# Altium PCB Main.PcbDoc
Units mm, origin at the board's own origin, x right, y up, seen from the top; angles counter-clockwise.
Board outline 95 x 57 mm, 2 copper layers (Top Layer, Bottom Layer), stack 1.671 mm thick; 91 components, 89 nets, 355 pads, 0 vias.
Unrouted connection lines stored in the file: 230.
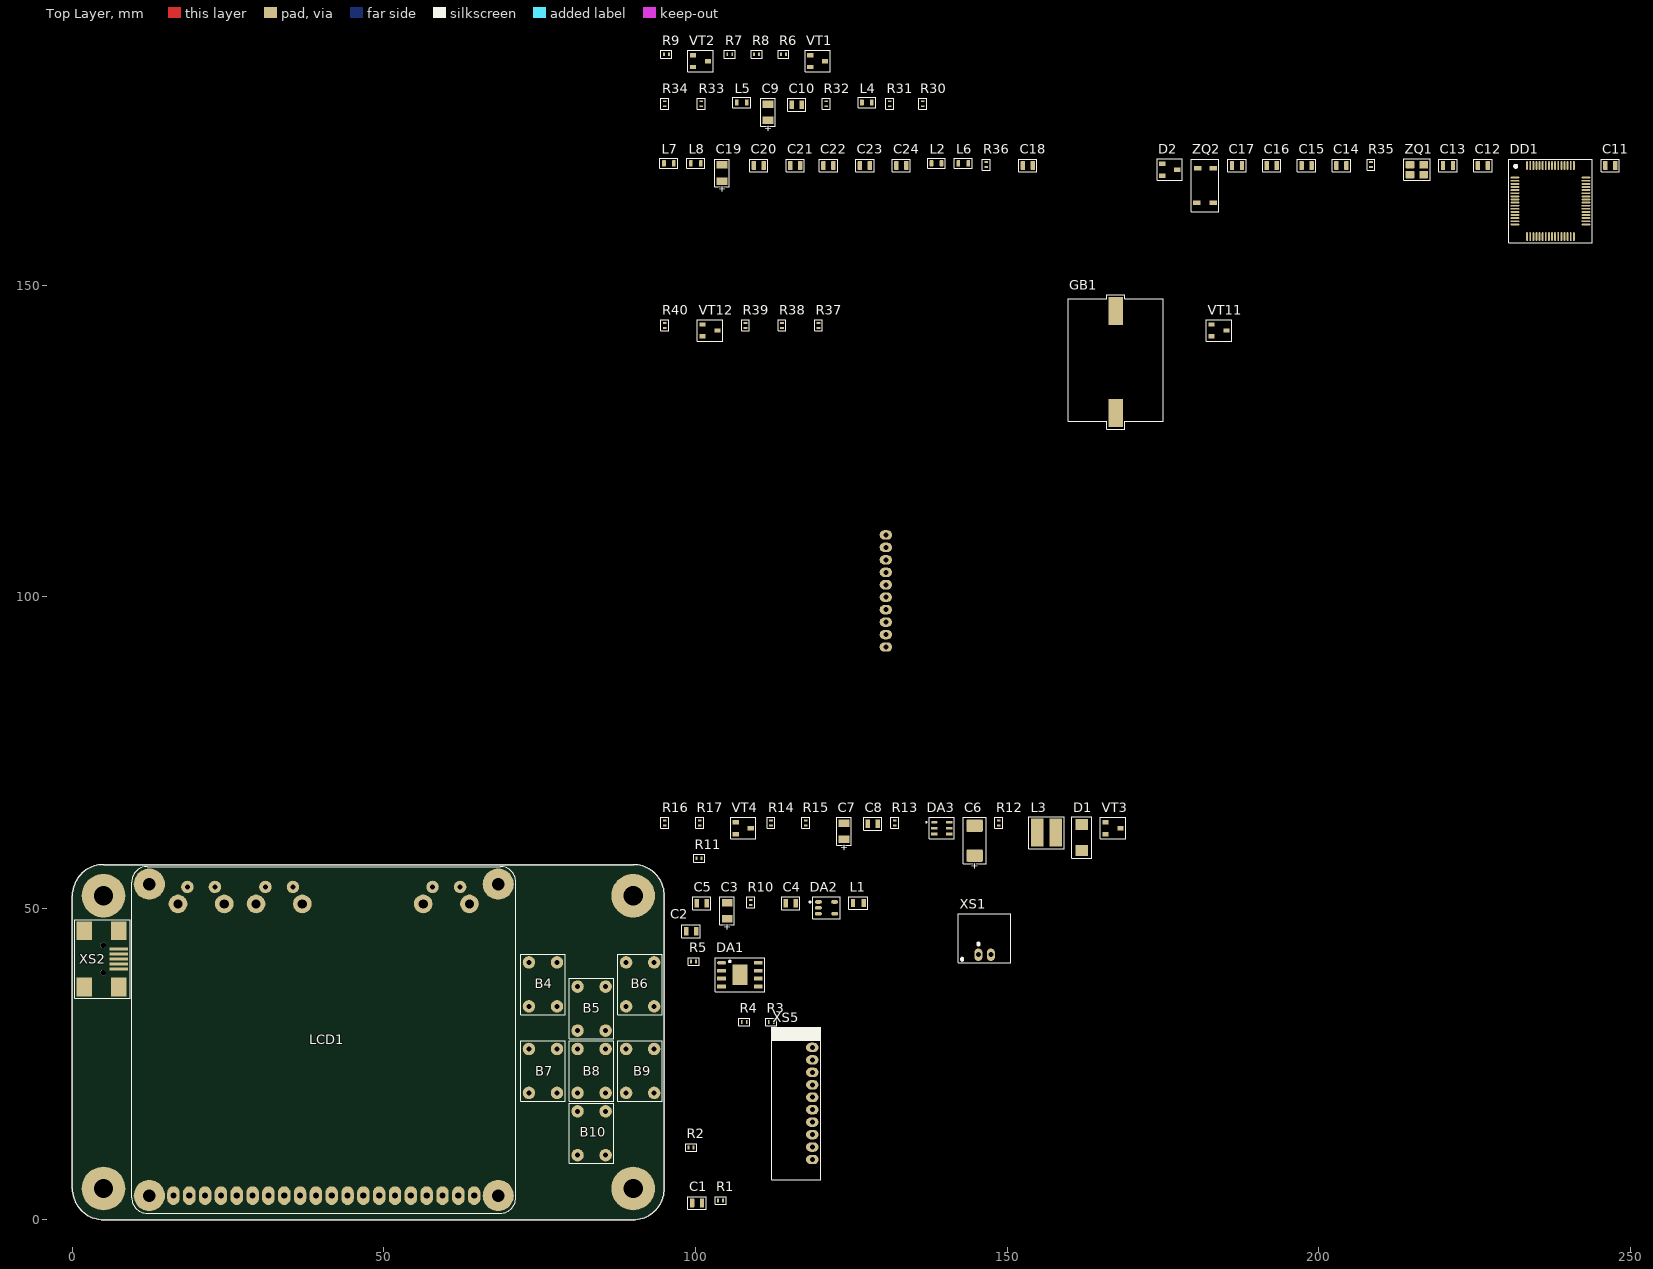
[diagram p0: Top Layer view]
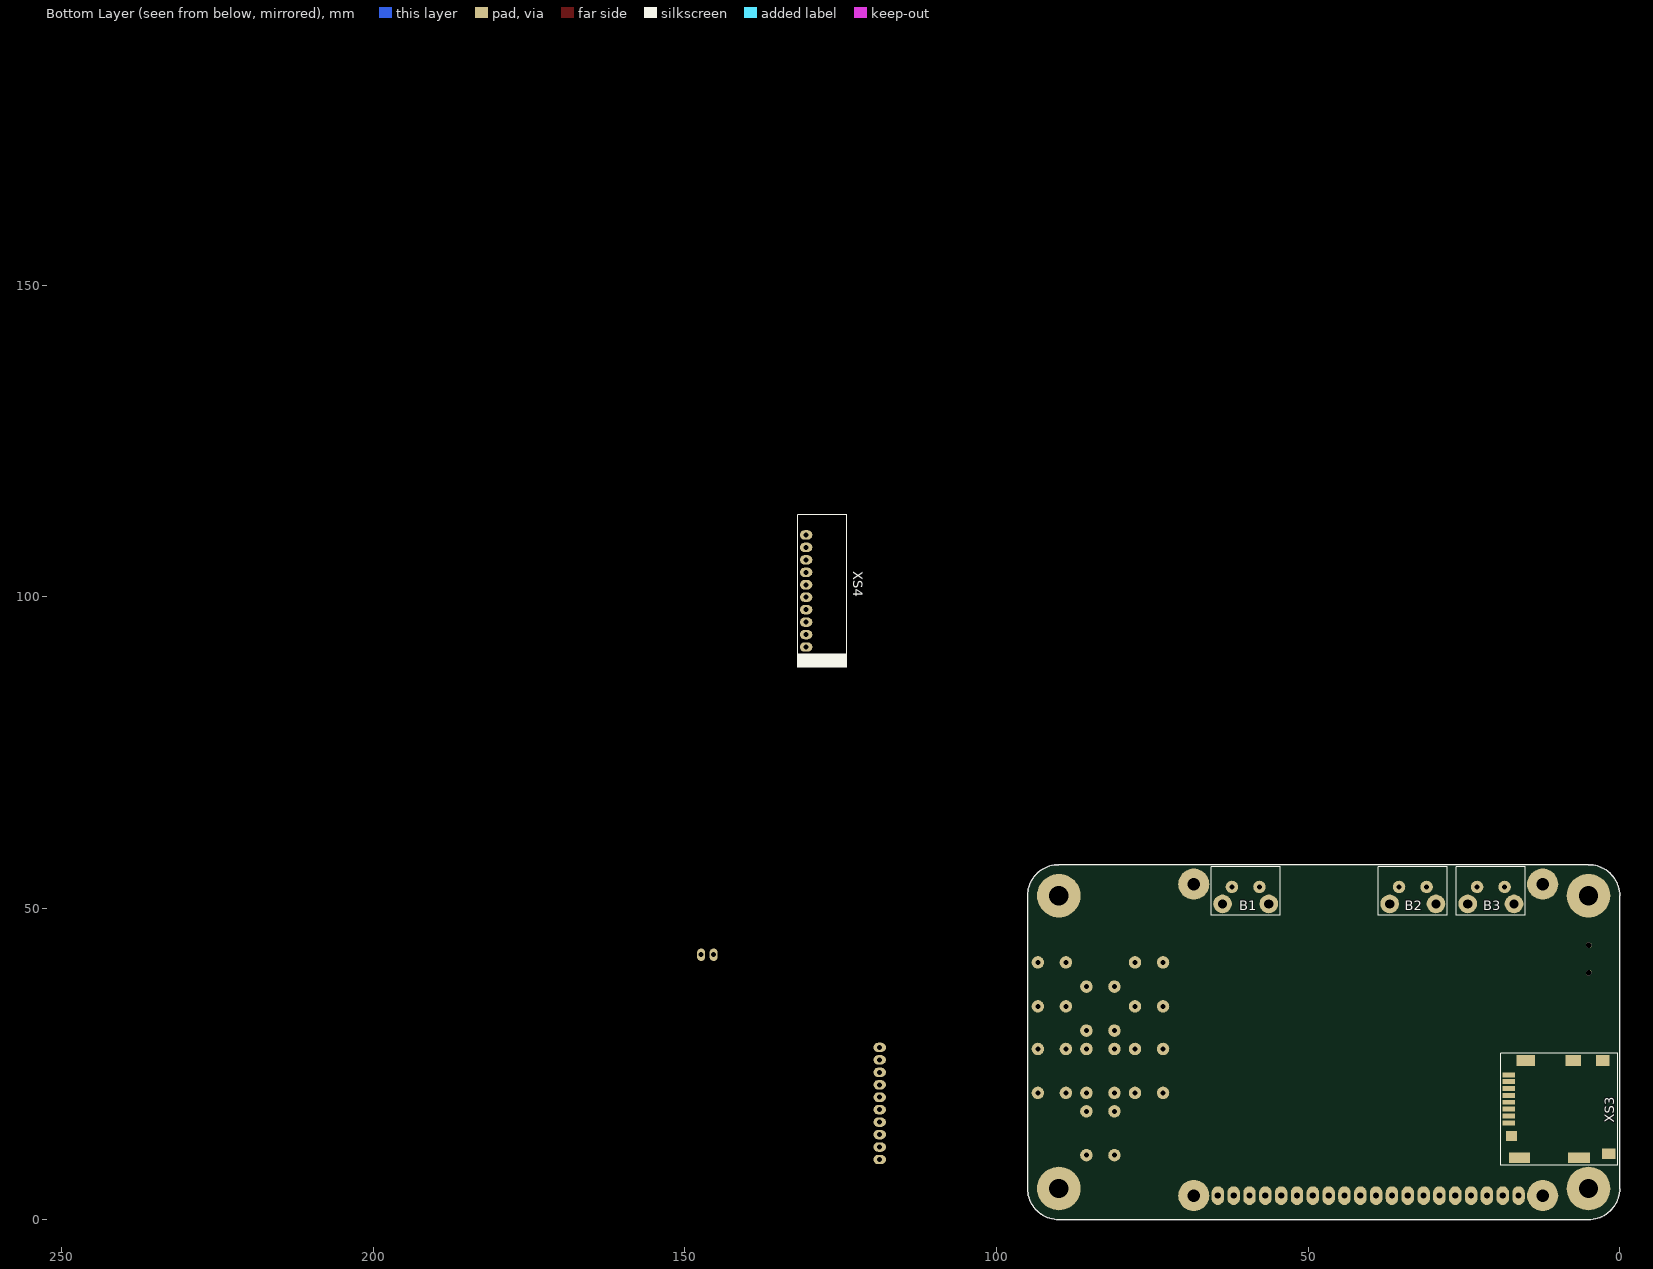
[diagram p1: Bottom Layer view, seen from below]

## Layer stack, top to bottom
Top Solder: solder mask 0.0102, Solder Resist, Dk 3.5
Top Layer: signal copper 0.0356
Dielectric 1: dielectric 1.6, FR-4, Dk 4.8
Bottom Layer: signal copper 0.0356
Bottom Solder: solder mask 0.0102, Solder Resist, Dk 3.5

## Board outline
0,5 0,52 cw(c5,52) 5,57 90,57 cw(c90,52) 95,52 95,5 cw(c90,5) 90,0 5,0 cw(c5,5)

## Design rules (kind name [scope] priority, off if disabled: settings)
Clearance [All] p1: gap=0.15 ignorepadtopadclearanceinfootprint=FALSE
ComponentClearance [All] p1: gap=0.1 collisioncheckmode=3 verticalgap=1 showdistances=TRUE
DiffPairsRouting [All] p1: maxlimit=0.3 minlimit=0.15 mostfreqgap=0.3 toplayer_minwidth=0.15 toplayer_maxwidth=0.3 toplayer_prefwidth=0.3 bottomlayer_minwidth=0.15 bottomlayer_maxwidth=0.3 bottomlayer_prefwidth=0.3 maxuncoupledlength=12.7
HoleSize [All] p1: absolutevalues=TRUE maxlimit=3.1 minlimit=0.3 maxpercent=80.000 minpercent=20.000
HoleToHoleClearance [All] p1: gap=0.3 allowstackedmicrovias=TRUE
MatchedLengths SDIO [InNetClass('SDIO')] p1: tolerance=1 checknetsindiffpair=FALSE checkdiffpairvsdiffpair=TRUE checkxsignals=TRUE checkothers=TRUE
MatchedLengths Usb [InNetClass('Usb')] p2: tolerance=1 checknetsindiffpair=TRUE checkdiffpairvsdiffpair=FALSE checkxsignals=FALSE checkothers=FALSE
MinimumSolderMaskSliver [All] p1: minsoldermaskwidth=0.05
PlaneClearance [All] p1: clearance=0.08
PlaneConnect [All] p1: planeconnectstyle=Relief reliefexpansion=0.15 reliefentries=4 reliefconductorwidth=0.15 reliefairgap=0.15
PolygonConnect SdGND [InNet('SD_GND')] p1: thpad.connectstyle=Relief thpad.reliefconductorwidth=0.15 thpad.reliefentries=4 thpad.polygonreliefangle="90 Angle" thpad.airgapwidth=0.15 smdpad.connectstyle=Relief smdpad.reliefconductorwidth=0.15 smdpad.reliefentries=4 smdpad.polygonreliefangle="90 Angle" smdpad.airgapwidth=0.15 via.connectstyle=Direct via.reliefconductorwidth=0.254 via.reliefentries=4 via.polygonreliefangle="90 Angle" via.airgapwidth=0.254
PolygonConnect McGND [InNet('MC_GND') vs InNet('MC_GND')] p2: thpad.connectstyle=Relief thpad.reliefconductorwidth=0.15 thpad.reliefentries=4 thpad.polygonreliefangle="90 Angle" thpad.airgapwidth=0.15 smdpad.connectstyle=Relief smdpad.reliefconductorwidth=0.15 smdpad.reliefentries=4 smdpad.polygonreliefangle="90 Angle" smdpad.airgapwidth=0.15 via.connectstyle=Direct via.reliefconductorwidth=0.254 via.reliefentries=4 via.polygonreliefangle="90 Angle" via.airgapwidth=0.254
PolygonConnect BatGND [InNet('BAT_GND') vs InNet('BAT_GND')] p3: thpad.connectstyle=Relief thpad.reliefconductorwidth=0.15 thpad.reliefentries=4 thpad.polygonreliefangle="90 Angle" thpad.airgapwidth=0.15 smdpad.connectstyle=Relief smdpad.reliefconductorwidth=0.15 smdpad.reliefentries=4 smdpad.polygonreliefangle="90 Angle" smdpad.airgapwidth=0.15 via.connectstyle=Direct via.reliefconductorwidth=0.254 via.reliefentries=4 via.polygonreliefangle="90 Angle" via.airgapwidth=0.254
PolygonConnect [All] p4: connectstyle=Relief reliefconductorwidth=0.15 reliefentries=4 polygonreliefangle="90 Angle" airgapwidth=0.15
RoutingVias [All] p1: holewidth=0.3 width=0.7 viastyle="Through Hole" minholewidth=0.3 minwidth=0.7 maxholewidth=0.3 maxwidth=0.7
SilkToSilkClearance [All] p1: silktosilkclearance=0.15
SilkToSolderMaskClearance [IsPad] p1: minsilkscreentomaskgap=0.15 clearancetoexposedcopper=TRUE
SolderMaskExpansion [All] p1: expansion=0.05
Width [All] p1: maxlimit=1 minlimit=0.15 preferedwidth=0.3
21 further rules are at their usual default settings.

## Classes and differential pairs
component class Microcontroller: C11 C12 C13 C14 C15 C16 C17 C18 C19 C20 C21 C22 C23 C24 D2 DD1 GB1 L2 L6 L7 L8 R35 R36 ZQ1 ZQ2
component class DcDc5V: C6 C7 C8 D1 DA3 L3 R12 R13 R14 R15 R16 R17 VT3 VT4
component class DcDc3V3: C3 C4 C5 DA2 L1 R10 R11
component class BatteryCheck: C1 R1 R2
component class Connectors: B1 B2 B3 R3 R4 XS1 XS2 XS3 XS4 XS5
component class ControlledCharger: C2 DA1 R5
component class PowerManagement: R6 R7 R8 R9 VT1 VT2
component class MicroSdCard: C9 C10 L4 L5 R30 R31 R32 R33 R34
component class KeyBoard: B4 B5 B6 B7 B8 B9 B10
component class Lcd: LCD1 R37 R38 R39 R40 VT11 VT12

## Components (designator, comment, footprint, x,y, rotation, side; value= is the part's Value field where it differs from the comment)
B1 "PWR_ON" "TACT SKHH Horizontal Switch" 63.725,50.675 r180 bottom locked
B2 "VALUE_UP" "TACT SKHH Horizontal Switch" 36.9,50.675 r180 bottom locked
B3 "VALUE_DOWN" "TACT SKHH Horizontal Switch" 24.375,50.675 r180 bottom locked
B4 "MENY" BUTTON_DIP 73.375,41.175 r0 top
B5 "UP" BUTTON_DIP 81.175,37.275 r0 top
B6 "RETURN" BUTTON_DIP 88.975,41.175 r0 top
B7 "LEFT" BUTTON_DIP 73.375,27.275 r0 top
B8 "ENTER" BUTTON_DIP 81.175,27.275 r0 top
B9 "RIGHT" BUTTON_DIP 88.975,27.275 r0 top
B10 "DOWN" BUTTON_DIP 81.175,17.275 r0 top
C1 "0.1 мкФ" "C 0805" 99.331,3.303 r0 top
C2 "0.1 мкФ" "C 0805" 98.375,46.9 r0 top
C3 "10 мкФ" "C TAN_A" 104.282,47.981 r90 top
C4 "18 пФ" "C 0805" 114.357,51.406 r0 top
C5 "4.7 мкФ" "C 0805" 100.081,51.406 r0 top
C6 "100 мкФ" "C TAN_C" 144.809,60.831 r90 top
C7 "10 мкФ" "C TAN_A" 123.032,60.731 r90 top
C8 "0.1 мкФ" "C 0805" 127.533,64.156 r0 top
C9 "10 мкФ" "C TAN_A" 110.832,176.137 r90 top
C10 "0.1 мкФ" "C 0805" 115.332,179.562 r0 top
C11 "22 пФ" "C 0805" 245.888,169.811 r0 top
C12 "4.7 мкФ" "C 0805" 225.437,169.811 r0 top
C13 "22 пФ" "C 0805" 219.837,169.811 r0 top
C14 "4.7 мкФ" "C 0805" 202.736,169.811 r0 top
C15 "0.1 мкФ" "C 0805" 197.161,169.811 r0 top
C16 "22 пФ" "C 0805" 191.561,169.811 r0 top
C17 "22 пФ" "C 0805" 185.986,169.811 r0 top
C18 "0.1 мкФ" "C 0805" 152.409,169.811 r0 top
C19 "10 мкФ" "C TAN_A" 103.457,166.386 r90 top
C20 "0.1 мкФ" "C 0805" 109.232,169.811 r0 top
C21 "0.1 мкФ" "C 0805" 115.082,169.811 r0 top
C22 "0.1 мкФ" "C 0805" 120.407,169.811 r0 top
C23 "0.1 мкФ" "C 0805" 126.258,169.811 r0 top
C24 "0.1 мкФ" "C 0805" 132.108,169.811 r0 top
D1 "SS14 (1n5819)" SMA/DO-214AC 161.984,61.331 r90 top
D2 "BAT54C" SOT-23 176.11,168.511 r0 top
DA1 "TP4056" HSOP-8 107.132,39.33 r0 top
DA2 "NCP1529ASNT1G" TSOP-5 121.032,50.056 r0 top
DA3 "PT1301" SOT-23-6 139.533,62.831 r0 top
DD1 "STM32F415RxTx" LQFP64 237.213,163.486 r0 top
GB1 "S8411-45R" S8411-45R 167.45,137.65 r0 top
L1 "LQM21NN2R2K" LQM21N 125.283,50.831 r0 top
L2 "BLM18AG102SN1" "FB 0603" 138.683,169.536 r0 top
L3 "4.7 мкГн" CD43 156.334,62.131 r0 top
L4 "BLM18AG102SN1" "FB 0603" 127.508,179.287 r0 top
L5 "BLM18AG102SN1" "FB 0603" 107.432,179.287 r0 top
L6 "BLM18AG102SN1" "FB 0603" 142.983,169.536 r0 top
L7 "BLM18AG102SN1" "FB 0603" 95.731,169.536 r0 top
L8 "BLM18AG102SN1" "FB 0603" 100.056,169.536 r0 top
LCD1 "20PIN COG 12864 LCD Screen Module ST7565R" "COG 12864 LCD Screen Module ST7565R" 9.52,1.032 r0 top locked
R1 "10 кОм" "RES 0402" 104.032,3.078 r0 top
R2 "10 кОм" "RES 0402" 99.3,11.6 r0 top
R3 "11 кОм" "RES 0402" 112.157,31.73 r0 top
R4 "1.5 кОм" "RES 0402" 107.832,31.73 r0 top
R5 "10 кОм" "RES 0402" 99.706,41.43 r0 top
R6 "4.7 кОм" "RES 0402" 114.132,187.037 r0 top
R7 "1 кОм" "RES 0402" 105.507,187.037 r0 top
R8 "27 Ом" "RES 0402" 109.807,187.037 r0 top
R9 "10 кОм" "RES 0402" 95.331,187.037 r0 top
R10 "910 кОм" "RES 0402" 108.857,50.931 r90 top
R11 "200 кОм" "RES 0402" 100.575,58.025 r0 top
R12 "4.7 кОм" "RES 0402" 148.684,63.681 r90 top
R13 "27 Ом" "RES 0402" 131.983,63.681 r90 top
R14 "1 кОм" "RES 0402" 112.107,63.681 r90 top
R15 "3 мОм" "RES 0402" 117.682,63.681 r90 top
R16 "10 кОм" "RES 0402" 95.081,63.681 r90 top
R17 "1 мОм" "RES 0402" 100.681,63.681 r90 top
R30 "47 кОм" "RES 0402" 136.483,179.087 r90 top
R31 "47 кОм" "RES 0402" 131.158,179.087 r90 top
R32 "47 кОм" "RES 0402" 121.007,179.087 r90 top
R33 "47 кОм" "RES 0402" 100.931,179.087 r90 top
R34 "47 кОм" "RES 0402" 95.081,179.087 r90 top
R35 "11 кОм" "RES 0402" 208.412,169.336 r90 top
R36 "1.5 кОм" "RES 0402" 146.659,169.336 r90 top
R37 "4.7 кОм" "RES 0402" 119.732,143.535 r90 top
R38 "27 Ом" "RES 0402" 113.882,143.535 r90 top
R39 "1 кОм" "RES 0402" 108.032,143.535 r90 top
R40 "10 кОм" "RES 0402" 95.081,143.535 r90 top
VT1 "IRLML6402" SOT-23 119.607,185.937 r0 top
VT2 "BC817" SOT-23 100.806,185.937 r0 top
VT3 "IRLML6402" SOT-23 167.01,62.831 r0 top
VT4 "BC817" SOT-23 107.657,62.831 r0 top
VT11 "IRLML6402" SOT-23 184.035,142.71 r0 top
VT12 "BC817" SOT-23 102.331,142.71 r0 top
XS1 "Battery" "JST B2B-PH-SM4-TB" 145.4,42.525 r0 top
XS2 "USB-mini, type B" USB_mini_B -0.96,41.85 r90 top locked
XS3 "49225-0821" "MOLEX 49225-0821" 1.075,17.75 r270 bottom locked
XS4 "JST B10B-PH-SM4-TB" B10B-PH-SM4-TB 130.55,109.9 r270 bottom
XS5 "JST B10B-PH-SM4-TB" B10B-PH-SM4-TB 118.75,9.654 r90 top
ZQ1 "NX3225SA-16.000M-STD-CRS-2" NX3225SA 215.762,168.511 r0 top value="16 МГц"
ZQ2 "MC-306" MC-306 180.185,161.986 r90 top value=32.768kHz

## Footprints (in the part's own frame and the unit in brackets; to place one, negate y for a bottom-side part, rotate by r counter-clockwise, add the part's x,y. Pads: shape width x height; smd on the part's side, far side on the other; paste and mask are expansions set on the pad)
B10B-PH-SM4-TB [mm]
  oval 1.5x2 hole 0.8: 1(18,0) 2(16,0) 3(14,0) 4(12,0) 5(10,0) 6(8,0) 7(6,0) 8(4,0) 9(2,0) 10(0,0)
  silkscreen extent -3.22,-1.35 21.2,6.55, body extent -2.97,-0.3 20.98,6.3, height 5.02
BUTTON_DIP [mm]
  round 2 hole 0.8: 1(-0.1,-6.925) 1(-0.1,0.125) 2(4.4,-6.925) 2(4.4,0.125)
  silkscreen extent -1.43,-8.25 5.72,1.45, body extent -0.95,-7.35 5.25,0.55, height 7
"C 0805" [mm]
  rrect20% 0.7x1.4 smd: 1(0.125,-0.625) 2(1.725,-0.625)
  silkscreen extent -0.55,-1.65 2.4,0.4, body extent -0.1,-1.28 1.9,0.03, height 0.73
"C TAN_A" [mm]
  rect 1.2x1.7 smd: 1(0.3,-0.8) 2(2.9,-0.8)
  silkscreen extent -0.63,-1.97 3.83,0.38, body extent -0.1,-1.7 3.3,0.1, height 1.7
"C TAN_C" [mm]
  rrect20% 2x2.6 smd: 1(-2.4,0) 2(2.4,0)
  silkscreen extent -3.72,-1.83 3.72,1.83, body extent -3,-1.6 3,1.6, height 2.6
CD43 [mm] "Для катушки индуктивности."
  rect 2x4.5 smd: 1(-1.5,0) 2(1.5,0)
  silkscreen extent -2.83,-2.58 2.83,2.58, body extent -2.4,-2.15 2.4,2.15, height 3.5
"COG 12864 LCD Screen Module ST7565R" [mm]
  round 5 hole 2: 0(2.83,2.843) 0(2.83,52.817) 0(58.82,2.843) 0(58.82,52.817)
  oval 2x3 hole 1: 1(54.96,2.833) 2(52.42,2.833) 3(49.88,2.833) 4(47.34,2.833) 5(44.8,2.833) 6(42.26,2.833) 7(39.72,2.833) 8(37.18,2.833) 9(34.64,2.833) 10(32.1,2.833) 11(29.56,2.833) 12(27.02,2.833) 13(24.48,2.833) 14(21.94,2.833) 15(19.4,2.833) 16(16.86,2.833) 17(14.32,2.833) 18(11.78,2.833) 19(9.24,2.833) 20(6.7,2.833)
  silkscreen extent 0,0 61.65,55.65, body extent 0.51,0.77 61.13,54.88, height 9.4
"FB 0603" [mm]
  rrect35% 0.6x1 smd: 1(-0.8,0) 2(0.8,0)
  silkscreen extent -1.43,-0.82 1.43,0.82, body extent -0.8,-0.43 0.8,0.43, height 0.9
HSOP-8 [mm]
  oval 1.4x0.6 smd: 1(-2.95,1.905)
  rect 1.4x0.6 smd: 2(-2.95,0.635) 3(-2.95,-0.635) 4(-2.95,-1.905) 5(2.95,-1.905) 6(2.95,-0.635) 7(2.95,0.635) 8(2.95,1.905)
  rect 2.41x3.3 smd: EP(0,0)
  silkscreen extent -3.98,-2.73 3.98,2.73, body extent -3,-2.5 3,2.5, height 1.7
"JST B2B-PH-SM4-TB" [mm]
  oval 1.3x2 hole 0.8: 1(0,0) 2(2,0)
  silkscreen extent -3.2,-1.33 5.2,6.58, body extent -2.98,-0.25 4.97,6.35, height 5
LQFP64 [mm]
  oval 1.4x0.3 smd: 1(-5.7,3.75) 2(-5.7,3.25) 3(-5.7,2.75) 4(-5.7,2.25) 5(-5.7,1.75) 6(-5.7,1.25) 7(-5.7,0.75) 8(-5.7,0.25) 9(-5.7,-0.25) 10(-5.7,-0.75) 11(-5.7,-1.25) 12(-5.7,-1.75) 13(-5.7,-2.25) 14(-5.7,-2.75) 15(-5.7,-3.25) 16(-5.7,-3.75) 33(5.7,-3.75) 34(5.7,-3.25) 35(5.7,-2.75) 36(5.7,-2.25) 37(5.7,-1.75) 38(5.7,-1.25) 39(5.7,-0.75) 40(5.7,-0.25) 41(5.7,0.25) 42(5.7,0.75) 43(5.7,1.25) 44(5.7,1.75) 45(5.7,2.25) 46(5.7,2.75) 47(5.7,3.25) 48(5.7,3.75)
  oval 0.3x1.4 smd: 17(-3.75,-5.7) 18(-3.25,-5.7) 19(-2.75,-5.7) 20(-2.25,-5.7) 21(-1.75,-5.7) 22(-1.25,-5.7) 23(-0.75,-5.7) 24(-0.25,-5.7) 25(0.25,-5.7) 26(0.75,-5.7) 27(1.25,-5.7) 28(1.75,-5.7) 29(2.25,-5.7) 30(2.75,-5.7) 31(3.25,-5.7) 32(3.75,-5.7) 49(3.75,5.7) 50(3.25,5.7) 51(2.75,5.7) 52(2.25,5.7) 53(1.75,5.7) 54(1.25,5.7) 55(0.75,5.7) 56(0.25,5.7) 57(-0.25,5.7) 58(-0.75,5.7) 59(-1.25,5.7) 60(-1.75,5.7) 61(-2.25,5.7) 62(-2.75,5.7) 63(-3.25,5.7) 64(-3.75,5.7)
  silkscreen extent -6.73,-6.73 6.73,6.73, body extent -6,-6 6,6, height 1.6
LQM21N [mm] "(0805 Size)"
  rect 0.7x1.3 smd: 1(0,0) 2(1.7,0)
  silkscreen extent -0.67,-0.98 2.37,0.97, body extent -0.15,-0.63 1.85,0.62, height 0.6
MC-306 [mm]
  rect 0.7x1.2 smd: 1(1.25,-2.9) 2(6.75,-2.9) 3(6.75,-0.4) 4(1.25,-0.3)
  silkscreen extent -0.23,-3.83 8.23,0.63, body extent 0,-3.5 8,0.3, height 2.54
"MOLEX 49225-0821" [mm]
  rect 1.7x2.2 smd: 0(-7.8,-1.65) 0(7.15,-0.65)
  rect 1.7x3.4 smd: 0(7.8,-15)
  rect 1.7x3.6 smd: 0(7.8,-5.45)
  rect 0.8x2 smd: 1(2.2,-16.7) 2(1.1,-16.7) 3(0,-16.7) 4(-1.1,-16.7) 5(-2.2,-16.7) 6(-3.3,-16.7) 7(-4.4,-16.7) 8(-5.5,-16.7)
  rect 1.7x3 smd: 9(-7.8,-14)
  rect 1.7x2.5 smd: 10(-7.8,-6.4)
  rect 1.6x1.8 smd: 11(4.29,-16.3)
  silkscreen extent -8.98,-18.03 8.98,0.77, body extent -8.05,-17.05 8.05,0, height 1.98
NX3225SA [mm]
  rrect20% 1.4x1.2 smd: 1(-1.1,-0.8) 2(1.1,-0.8) 3(1.1,0.8) 4(-1.1,0.8)
  silkscreen extent -2.12,-1.73 2.12,1.73, body extent -1.6,-1.25 1.61,1.26, height 0.55
"RES 0402" [mm]
  rect 0.3x0.6 smd: 1(-0.4,0) 2(0.4,0)
  silkscreen extent -0.87,-0.63 0.87,0.63, body extent -0.5,-0.25 0.5,0.25, height 0.35
S8411-45R [mm]
  round 0 hole 1.26: 0(0,-3.95)
  round 0 hole 1.1: 0(0,3.5)
  rect 2.3x4.5 smd: 1(0,-8.2) 2(0,8.2)
  silkscreen extent -7.6,-10.78 7.6,10.78, body extent -7.37,-9.25 7.37,9.95, height 4.25
SMA/DO-214AC [mm]
  rect 1.8x2 smd: A(2.1,0) C(-2.1,0)
  silkscreen extent -3.35,-1.6 3.35,1.6, body extent -2.5,-1.35 2.5,1.35, height 2.2
SOT-23 [mm]
  rect 1x0.7 smd paste-0.05: 1(-1.2,0.95) 2(-1.2,-0.95) 3(1.2,0)
  silkscreen extent -2.02,-1.73 2.02,1.73, body extent -1.25,-1.5 1.25,1.5, height 1
SOT-23-6 [mm]
  oval 1x0.45 smd: 1(-1.2,0.95)
  rect 1x0.45 smd: 2(-1.2,0) 3(-1.2,-0.95) 4(1.2,-0.95) 5(1.2,0) 6(1.2,0.95)
  silkscreen extent -2.57,-1.73 2.02,1.73, body extent -1.33,-1.5 1.47,1.5, height 1.35
"TACT SKHH Horizontal Switch" [mm]
  round 3 hole 1.5: 0(0,0) 0(7.425,0)
  round 2 hole 0.8: 1(1.5,2.725) 2(5.925,2.725)
  silkscreen extent -1.83,-1.83 9.25,6, body extent -0.48,-1.38 7.88,11.09, height 7.37
TSOP-5 [mm]
  oval 1.1x0.6 smd: 1(-1.3,0.95) 2(-1.3,0) 3(-1.3,-0.95) 4(1.3,-0.95) 5(1.3,0.95)
  silkscreen extent -2.77,-1.75 2.17,1.75, body extent -1.53,-1.55 1.48,1.55, height 1.1
USB_mini_B [mm]
  rect 3x2.5 smd paste-2: 0(-4.5,-2.9) 0(-4.5,-8.4) 0(4.5,-2.9) 0(4.5,-8.4)
  rect 0.5x3 smd: 1(1.6,-8.4) 2(0.8,-8.4) 3(0,-8.4) 4(-0.8,-8.4) 5(-1.6,-8.4)
  round 0.9 hole 0.9 unplated mask+0: H(-2.2,-5.9) H(2.2,-5.9)
  silkscreen extent -6.32,-10.23 6.32,-1.33, body extent -5.35,-9.2 5.35,0, height 3.95

## Part data
B1 B2 B3 B4 B5 B6 B7 B8 B9 B10: library part BUTTON
C1 C2 C4 C5 C8 C10 C11 C12 C13 C14 C15 C16 C17 C18 C20 C21 C22 C23 C24: library part "CAP 0805", "SMD Capacitor 0805", Manufacturer="/Укажите компанию-производителя/", Temperature coefficient="/Формат: ±? ppm/°C/", Temperature range="/Формат: -? ... ? °C/", Tolerance="/Укажите допуск в процентах/", Size=0805, TC="/Укажите тип диэлектрика/", Type="Конденсатор керамический"
C3 C9 C19: library part "CAP TAN_A", "SMD Tantalium Capacitor A", Rated voltage=16, Size=A, Type="Конденсатор танталовый"
C6: library part "CAP TAN_C", "SMD Tantalium Capacitor C", Size=C, Type="Конденсатор танталовый"
C7: library part "CAP TAN_A", "SMD Tantalium Capacitor A", Rated voltage="10 В", Size=A, Type="Конденсатор танталовый"
D1: library part "D SS14 (1n5819)"
DA3: "DC-DC step-up (повышающий) PT1301 в корпусе SOT23-6."
L3: library part "L 4.7 uH", "Катушка индуктивности 4.7 мкГн корпус CD43 (индуктивность 4.7 uH)."
R1 R2 R3 R4 R5 R6 R7 R8 R9 R10 R11 R12 R13 R14 R15 R16 R17 R30 R31 R32 R33 R34 R35 R36 R37 R38 R39 R40: library part "RES 0402"
VT2 VT4 VT12: "NPN general-purpose transistor", Base-emitter on voltage="1,2 В", Collector-emitter saturation voltage="0,7 В", Manufacturer=NXP, Max collector-base voltage="50 В", Max collector-emitter voltage="45 В", Max collector current="0,5 А", Max collector peak current="1 А", Max emitter-base voltage="5 В", Power dissitipation="0,25 Вт", Temperature range="-65 ... 150 °C", Collector-base сapacitance="3 пФ", Complement=BC807, fT="100 МГц", hFE="160 ... 600", Specitication="ЭКБ ИП", Structure=n-p-n, Type="Транзистор биполярный"
XS1: library part "JST B2B-PH-SM4-TB"
XS2: library part USB-mini_B, "USB-mini-B connector", Manufacturer=NONAME, Connector type="USB-mini, тип B на плату", Number of contacts=5, Type=Разъем
XS3: "MOLEX MicroSD connector", Manufacturer=Molex, Connector type="Разъем MicroSD на плату", Number of contacts=11, Type=Разъем
XS4 XS5: "PLS connector", Manufacturer=NONAME, Connector type="Вилка на плату", Number of contacts=10, Type="Разъем штыревой"
ZQ1: "QUARTZ CRYSTAL", Frequency stability="±15 ppm", Load capacitance="8 пФ", Manufacturer=NDK, Temperature range="-40 ... 125 °C", Type="Кварцевый резонатор"
ZQ2: "QUARTZ CRYSTAL", Type="Кварцевый резонатор"

## Free pads (board coordinates)
  round 7 hole 3.1: 0(5,5) 0(5,52) 0(90,5) 0(90,52)

## Nets (pads, with @x,y where several pads share a name; then routed paths per layer and width w, separated by ;. In a path a pad name is that pad's centre, name@x,y a point inside that pad or via, vN(x,y) a via of type N, cw(c..) or ccw(c..) an arc to the next point about the centre after c; other vN are vias at no path point)
ADC_BAT: C1.1 DD1.14 R1.1 R2.2
AMPLIFIER_LEFT: DD1.15 XS5.2
AMPLIFIER_RIGHT: DD1.16 XS5.3
BAT_CHRG: DA1.7 DD1.61
BAT_GND: B1.1 C2.2 C3.2 C5.2 C6.2 C7.2 C8.2 DA1.1 DA1.3 DA1.EP DA2.2 DA3.3 L7.1 LCD1.6 R5.1 R9.1 R11.2 R16.1 R17.1 R40.1 VT2.2 VT4.2 VT12.2 XS1.2 XS2.0 XS2.5 XS5.10
BAT_STDBY: DA1.6 DD1.2
BAT_VDD: DA1.5 R1.2 R6.2 VT1.2 XS1.1
BC0: B4.2 B7.2 DD1.22
BC1: B5.2 B8.2 B10.2 DD1.24
BC2: B6.2 B9.2 DD1.25
BOARD_CLK: DD1.29 XS5.5
BOARD_GPIO_1: XS5.6
BOARD_GPIO_2: XS5.7
BOARD_GPIO_3: XS5.8
BOARD_GPIO_4: XS5.9
BOARD_TX: DD1.11 XS5.4
BOOT_0: DD1.60 R36.2
BR0: B4.1 B5.1 B6.1 DD1.8
BR1: B7.1 B8.1 B9.1 DD1.9
BR2: B10.1 DD1.10
BUTTON_PWR_ON: B1.2 R8.1 VT2.3
BUTTON_VALUE_DOWN: B3.2 DD1.20
BUTTON_VALUE_UP: B2.2 DD1.17
DEBUG_RX: DD1.59 XS4.7
DEBUG_TX: DD1.58 XS4.6
JT_CLK: DD1.49 XS4.2
JT_DI: DD1.50 XS4.3
JT_DO: DD1.55 XS4.4
JT_MS: DD1.46 XS4.1
JT_RST: DD1.56 XS4.5
LCD_A0: DD1.26 LCD1.8
LCD_A_PWM: LCD1.5 VT11.3
LCD_CLK: DD1.21 LCD1.12
LCD_CS: DD1.27 LCD1.10
LCD_PWM: DD1.41 R39.2
LCD_RES: DD1.28 LCD1.9
LCD_TX: DD1.23 LCD1.11
LTC_SEN: DD1.57
MC_GND: B2.1 B3.1 C1.2 C11.2 C12.2 C13.2 C14.2 C15.1 C16.2 C17.2 C18.2 C19.2 C20.2 C21.2 C22.2 C23.2 DD1.18 DD1.63 GB1.2 L5.1 L7.2 L8.1 R2.1 R36.1 XS4.10
MC_USB_ID: DD1.43 R4.1
MC_VDD: C19.1 C20.1 C21.1 C22.1 C23.1 D2.2 DD1.19 DD1.32 DD1.48 DD1.64 L2.2 L6.1 R35.1 XS4.9
NetC4_2: C4.2 DA2.5 R10.1 R11.1
NetC6_1: C6.1 L3.1 VT3.3
NetD1_A: D1.A DA3.4 L3.2
NetD2_1: D2.1 GB1.1
NetDA1_2: DA1.2 R5.2
NetDA2_3: DA2.3 L1.1
NetDA3_6: DA3.6 R15.1 R17.2
NetR6_1: R6.1 R8.2 VT1.1
NetR7_1: R7.1 R9.2 VT2.1
NetR12_1: R12.1 R13.2 VT3.1
NetR13_1: R13.1 VT4.3
NetR14_1: R14.1 R16.2 VT4.1
NetR37_1: R37.1 R38.2 VT11.1
NetR38_1: R38.1 VT12.3
NetR39_1: R39.1 R40.2 VT12.1
NRST: C15.2 DD1.7 R35.2 XS4.8
OSC32_IN: C16.1 DD1.3 ZQ2.4
OSC32_OUT: C17.1 DD1.4 ZQ2.1
OSC_IN: C11.1 DD1.5 ZQ1.3
OSC_OUT: C13.1 DD1.6 ZQ1.1
PCB_BAT_VDD: C5.1 DA2.1 DA2.4 R12.2 VT1.3 VT3.2
PWR_5V_ON: R14.2
PWR_AMPLIFIER_ON: DD1.35
PWR_AY2_ON: DD1.36
PWR_ON: DD1.37 R7.2
SD_CD1: DD1.34 XS3.9
SD_CD2: DD1.33 XS3.10
SD_CLK: DD1.53 XS3.5
SD_D0: DD1.39 R30.2 XS3.7
SD_D1: DD1.40 R31.2 XS3.8
SD_D2: DD1.51 R32.2 XS3.1
SD_D3: DD1.52 R33.2 XS3.2
SD_GND: C9.2 C10.2 L5.2 XS3.0 XS3.6
SD_PUSH: DD1.30 XS3.11
SD_SMD: DD1.54 R34.2 XS3.3
SD_VDD: C9.1 C10.1 L4.2 R30.1 R31.1 R32.1 R33.1 R34.1 XS3.4
SH_STROB: DD1.62
USB_DM: DD1.44 XS2.2
USB_DP: DD1.45 XS2.3
USB_ID: R3.1 R4.2 XS2.4
USB_VDD: C2.1 DA1.4 DA1.8 DD1.42 R3.2 XS2.1
VBAT: C18.1 D2.3 DD1.1
VCAP_1: C12.1 DD1.31
VCAP_2: C14.1 DD1.47
VDD3V3: C3.1 C4.1 L1.2 L2.1 L4.1 LCD1.7 R10.2 R37.2 VT11.2
VDD_5V: C7.1 C8.1 D1.C DA3.1 DA3.5 R15.2 XS5.1
VDD_A: C24.1 DD1.13 L6.2
VSS_A: C24.2 DD1.12 L8.2
pads on no net: B1.0 B2.0 B3.0 DA3.2 DD1.38 GB1.0 LCD1.0 LCD1.1 LCD1.2 LCD1.3 LCD1.4 LCD1.13 LCD1.14 LCD1.15 LCD1.16 LCD1.17 LCD1.18 LCD1.19 LCD1.20 XS2.H ZQ1.2 ZQ1.4 ZQ2.2 ZQ2.3

## Silkscreen, mask and mechanical layers (free items; w line width, h text height)
Top Overlay:
  the board outline again, w0.15
Bottom Overlay:
  the board outline again, w0.15
Keep:
  the board outline again, w0.15

## Text inside footprints (layer, text, board x,y; h text height)
C3: Top Overlay "+" at 105.582,46.381 h1 r90
C6: Top Overlay "+" at 145.309,56.131 h1 r90
C7: Top Overlay "+" at 124.332,59.131 h1 r90
C9: Top Overlay "+" at 112.132,174.537 h1 r90
C19: Top Overlay "+" at 104.757,164.786 h1 r90